# Allegro board trail.brd
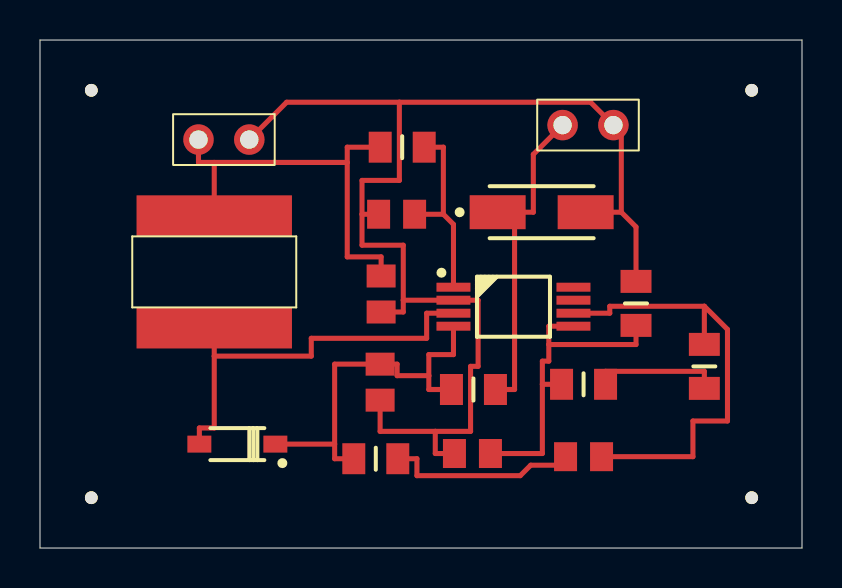
[diagram p0: board, top side]
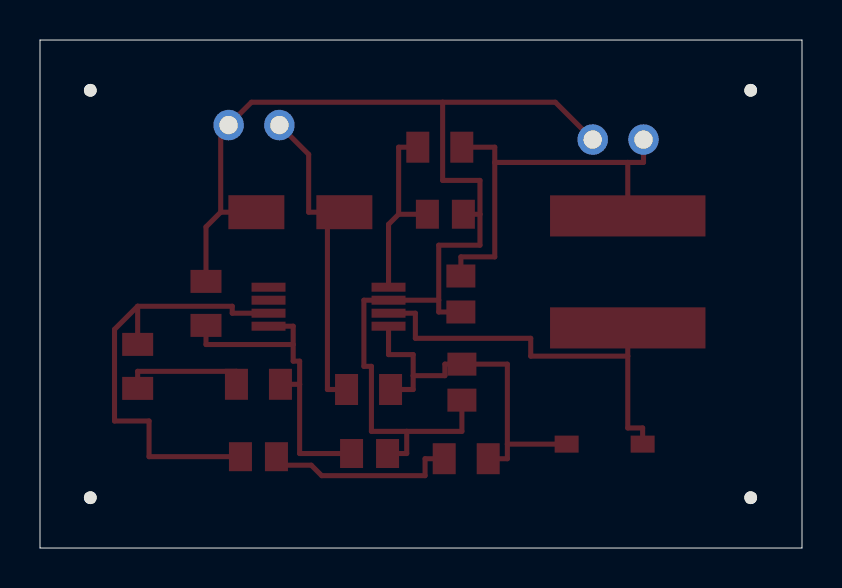
[diagram p1: board, bottom side, seen from below]

Outline 38.1 x 25.4 mm; copper layers: TOP, BOTTOM. Coordinates in mm from the lower left corner of the outline.
Outline path: 0,25.4 38.1,25.4 38.1,0 0,0 0,25.4

## Placement (name value [footprint] x y rotation side)
C2  1nF  [CAPC2013X145AN]  21.62 4.72 0 top
C4  1nF  [CAPC2013X145AN]  17.83 16.69 0 top
CF1  1u  [CAPC2013X145AN]  27.18 4.57 180 top
CIN1  4.7uF  [CAPC2013X145AN]  17.06 12.7 90 top
COUT1  10uF  [CAPC2013X145AN]  17.01 8.29 90 top
DOUT  SMM4F5.0  [DIOM5226X203M]  25.08 16.79 0 top
DS  STPS0560Z  [SOD3716X135M]  9.87 5.19 180 top
J1  CON2  [JUMPER2]  7.92 20.42 0 top
J2  CON2  [JUMPER2]  26.13 21.15 0 top
L1  10uH  [INDUCTOR_NRS8030]  8.71 13.8 270 top
NOREF  -  [unnamed]  2.57 22.89 0 top
NOREF#2  -  [unnamed]  35.59 2.51 0 top
NOREF#3  -  [unnamed]  2.57 2.51 0 top
NOREF#4  -  [unnamed]  35.59 22.89 0 top
R1  390k  [RESC2013X38M]  27.18 8.19 0 top
R3  1k  [RESC2013X38M]  18.11 20.04 180 top
R11  130k  [RESC2013X38M]  29.8 12.23 270 top
RF1  1k  [RESC2013X38M]  16.79 4.46 180 top
RF2  1k  [RESC2013X38M]  33.22 9.08 270 top
RS1  180m  [RESC2013X38M]  21.67 7.92 0 top
U1  spv1040  [SOP65P640X120-8M]  23.67 12.06 0 top

## Library data of the parts
C2 C4 CF1 CIN1 COUT1 = C
DOUT DS = mmsz5221_1.bt1
J1 J2 = CON2: User Part Number: ***
L1 = L
R1 R3 R11 RF1 RF2 RS1 = R
U1 = SPV1040

## Footprints (pads in the part's own frame, mm; a bottom-side part is the same pattern mirrored in y, then rotated)
CAPC2013X145AN
  rect 1.15x1.45 smd: 1(-0.9,0) 2(0.9,0)
DIOM5226X203M
  rect 2.8x1.7 smd: A(2.2,0) C(-2.2,0)
INDUCTOR_NRS8030
  rect 2.057x7.772 smd: 1(-2.8,0) 2(2.8,0)
JUMPER2
  round 1.524 hole 0.914: 1(0,0) 2(2.54,0)
RESC2013X38M
  rect 1.15x1.55 smd: 1(-1.1,0) 2(1.1,0)
SOD3716X135M
  rect 1.2x0.85 smd: A(1.9,0) C(-1.9,0)
SOP65P640X120-8M
  rect 1.7x0.45 smd: 1(-3,0.975) 2(-3,0.325) 3(-3,-0.325) 4(-3,-0.975) 5(3,-0.975) 6(3,-0.325) 7(3,0.325) 8(3,0.975)
unnamed
  round 0.635 hole 3.175 unplated: (0,0)

## Nets
GND_POWER: C2.1 C4.1 CIN1.1 COUT1.1 DOUT.A J1.2 J2.2 R11.1 U1.2(GND)
N00099: CIN1.2 J1.1 L1.1 R3.2
N00268: DS.A L1.2 U1.3(LX)
N00274: C4.2 R3.1 U1.1(MPP_SET) U1.8(XSHUT)
N00467: CF1.2 RF1.1 U1.7(ICTRL_PLUS)
N00476: CF1.1 RF2.1 U1.6(ICTRL_MINUS)
N00498: DOUT.C J2.1 R1.2 RF2.2 RS1.2
N00508: COUT1.2 DS.C RF1.2 RS1.1 U1.4(VOUT)
N00553: C2.2 R1.1 R11.2 U1.5(VCTRL)

## Routing (per net, layer and track width the routed paths; a pad name or vN(x,y) marks a point on that pad's centre or on a via; arc(x,y) is an arc through that point)
GND_POWER: length 64.7
  TOP w0.254: 29.07,16.79 29.8,16.05 R11.1 ; 29.07,16.79 29.07,20.75 J2.2 27.53,22.29 17.97,22.29 ; 29.07,16.79 DOUT.A ; C4.1 16.1,16.69 ; 16.1,16.69 16.1,18.38 17.97,18.38 17.97,22.29 ; 16.1,16.69 16.1,15.14 18.16,15.14 18.16,12.39 ; 19.76,5.83 21.53,5.83 21.53,9.08 21.9,9.08 21.9,12.39 U1.2 18.16,12.39 ; 19.76,5.83 17.01,5.83 COUT1.1 ; 19.76,5.83 19.76,4.72 C2.1 ; 18.16,12.39 18.16,11.8 CIN1.1 ; 17.97,22.29 12.33,22.29 J1.2
N00099: length 21
  TOP w0.254: R3.2 15.36,20.04 15.36,19.28 ; 8.71,19.28 15.36,19.28 ; 8.71,19.28 7.92,19.28 J1.1 ; 8.71,19.28 L1.1 ; 15.36,19.28 15.36,14.56 17.06,14.56 CIN1.2
N00268: length 20.7
  TOP w0.254: DS.A 7.97,6 8.71,6 8.71,9.59 ; L1.2 8.71,9.59 ; 8.71,9.59 13.56,9.59 13.56,10.49 19.33,10.49 19.33,11.74 U1.3
N00274: length 9.6
  TOP w0.254: U1.1 20.67,16.18 20.17,16.69 ; C4.2 20.17,16.69 ; 20.17,16.69 20.17,20.04 R3.1
N00467: length 9.9
  TOP w0.254: RF1.1 18.85,4.46 18.85,3.62 24.01,3.62 24.54,4.14 26.28,4.14 CF1.2
N00476: length 23.1
  TOP w0.254: U1.6 28.49,11.74 28.49,12.09 33.22,12.09 ; 33.22,12.09 34.37,10.93 34.37,6.35 32.65,6.35 32.65,4.57 CF1.1 ; 33.22,12.09 RF2.1
N00498: length 23
  TOP w0.254: RF2.2 33.22,8.83 28.28,8.83 R1.2 ; RS1.2 23.73,7.92 23.73,16.79 ; DOUT.C 23.73,16.79 ; 23.73,16.79 24.67,16.79 24.67,19.68 J2.1
N00508: length 19.5
  TOP w0.254: U1.4 20.67,9.67 19.44,9.67 19.44,8.62 ; RS1.1 19.44,7.92 19.44,8.62 ; DS.C 14.73,5.19 ; 14.73,5.19 14.73,4.46 RF1.2 ; 14.73,5.19 14.73,9.19 COUT1.2 17.86,9.19 17.86,8.62 19.44,8.62
N00553: length 16.8
  TOP w0.254: R1.1 25.12,8.19 ; 25.12,8.19 25.12,4.72 C2.2 ; 25.12,8.19 25.12,9.34 25.44,9.34 25.44,10.17 ; R11.2 29.8,10.17 25.44,10.17 ; 25.44,10.17 25.44,11.09 U1.5
